# Altium PCB 2PR.PcbDoc
Units mil, origin at the board's own origin, x right, y up, seen from the top; angles counter-clockwise.
Board outline 6000 x 4000 mil, 2 copper layers (Top Layer, Bottom Layer); 40 components, 27 nets, 112 pads, 0 vias.
Unrouted connection lines stored in the file: 60.
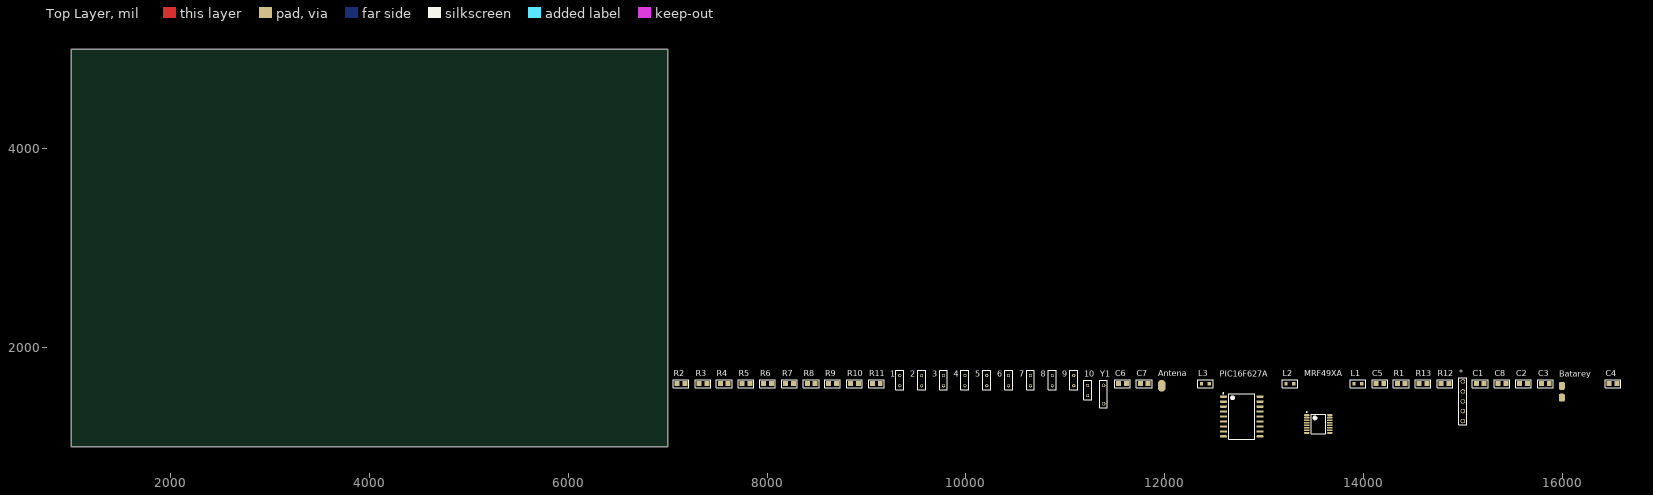
[diagram p0: Top Layer view]
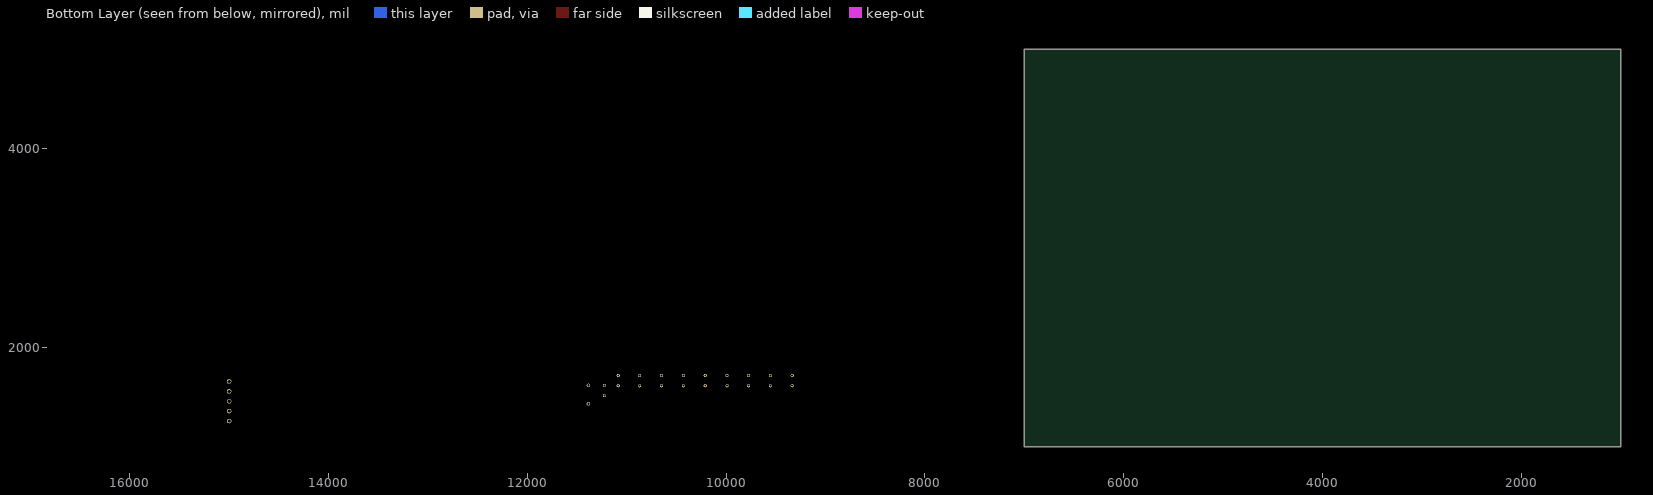
[diagram p1: Bottom Layer view, seen from below]

## Layer stack, top to bottom
Top Solder: solder mask 0.4, Solder Resist, Dk 3.5
Top Layer: signal copper 1.4
Dielectric 1: dielectric 12.6, FR-4, Dk 4.8
Bottom Layer: signal copper 1.4
Bottom Solder: solder mask 0.4, Solder Resist, Dk 3.5

## Board outline
1000,1000 7000,1000 7000,5000 1000,5000

## Design rules (kind name [scope] priority, off if disabled: settings)
Clearance [All] p1: gap=10
PolygonConnect [All] p1: connectstyle=Relief reliefconductorwidth=10 reliefentries=4 polygonreliefangle="90 Angle" airgapwidth=10
RoutingVias [All] p1: holewidth=28 width=50 viastyle="Through Hole" minholewidth=28 minwidth=50 maxholewidth=28 maxwidth=50
SolderMaskExpansion [All] p1: expansion=4
Width [All] p1: maxlimit=10 minlimit=10 preferedwidth=10
30 further rules are at their usual default settings.

## Components (designator, comment, footprint, x,y, rotation, side; value= is the part's Value field where it differs from the comment)
1 "" "Light-emitting diode" 9335,1615 r90 top
2 "" "Light-emitting diode" 9555,1615 r90 top
3 "" "Light-emitting diode" 9775,1615 r90 top
4 "" "Light-emitting diode" 9990,1615 r90 top
5 "" "Light-emitting diode" 10210,1615 r90 top
6 "" "Light-emitting diode" 10430,1615 r90 top
7 "" "Light-emitting diode" 10650,1615 r90 top
8 "" "Light-emitting diode" 10870,1615 r90 top
9 "" "Light-emitting diode" 11085,1615 r90 top
10 "" "Light-emitting diode" 11225,1515 r90 top
* "PLS5" PLS5 15000,1260 r90 top
Antena "Antena" Anteny 11970,1615 r90 top
Batarey "Batarey" Batarey 15995,1495 r90 top
C1 "" Ñ0805 15135,1635 r0 top
C2 "" Ñ0805 15570,1635 r0 top
C3 "" Ñ0805 15790,1635 r0 top
C4 "" Ñ0805 16470,1635 r0 top
C5 "" Ñ0805 14125,1635 r0 top
C6 "" Ñ0805 11535,1635 r0 top
C7 "" Ñ0805 11755,1635 r0 top
C8 "" Ñ0805 15355,1635 r0 top
L1 "" L? 13905,1635 r0 top
L2 "" L? 13220,1635 r0 top
L3 "" L? 12370,1635 r0 top
MRF49XA "MRF49XA" MRF49XA 13545,1230 r0 top
PIC16F627A "PIC16F627A" PIC16F627A 12775,1305 r0 top
R1 "" R0805 14340,1635 r0 top
R2 "" R0805 7095,1635 r0 top
R3 "" R0805 7315,1635 r0 top
R4 "" R0805 7530,1635 r0 top
R5 "" R0805 7750,1635 r0 top
R6 "" R0805 7965,1635 r0 top
R7 "" R0805 8185,1635 r0 top
R8 "" R0805 8405,1635 r0 top
R9 "" R0805 8620,1635 r0 top
R10 "" R0805 8840,1635 r0 top
R11 "" R0805 9060,1635 r0 top
R12 "" R0805 14780,1635 r0 top
R13 "" R0805 14560,1635 r0 top
Y1 "Y1" Quartz 11385,1435 r90 top

## Footprints (in the part's own frame and the unit in brackets; to place one, negate y for a bottom-side part, rotate by r counter-clockwise, add the part's x,y. Pads: shape width x height; smd on the part's side, far side on the other; paste and mask are expansions set on the pad)
Anteny [mm]
  oval 3x2 smd: 1(0,0)
Batarey [mm]
  rrect50% 2x1.524 smd: 1(0,0) 2(3,0)
L? [mm]
  rect 0.85x0.85 smd: 1(0,0) 2(2,0)
  silkscreen extent -1,-1 3,1
"Light-emitting diode" [mm]
  round 0.8 hole 0.5: 1(0,0) 2(2.6,0)
  silkscreen extent -1,-1 4,1
MRF49XA [mm]
  oval 1.4x0.45 smd: 1(-2.95,2.275) 2(-2.95,1.625) 3(-2.95,0.975) 4(-2.95,0.325) 5(-2.95,-0.325) 6(-2.95,-0.975) 7(-2.95,-1.625) 8(-2.95,-2.275) 9(2.95,-2.275) 10(2.95,-1.625) 11(2.95,-0.975) 12(2.95,-0.325) 13(2.95,0.325) 14(2.95,0.975) 15(2.95,1.625) 16(2.95,2.275)
  silkscreen extent -3.07,-2.55 1.85,3.17, body extent -2.25,-2.55 2.25,2.55, height 1.2
PIC16F627A [mm]
  oval 1.85x0.6 smd: 1(-4.675,5.08) 2(-4.675,3.81) 3(-4.675,2.54) 4(-4.675,1.27) 5(-4.675,0) 6(-4.675,-1.27) 7(-4.675,-2.54) 8(-4.675,-3.81) 9(-4.675,-5.08) 10(4.675,-5.08) 11(4.675,-3.81) 12(4.675,-2.54) 13(4.675,-1.27) 14(4.675,0) 15(4.675,1.27) 16(4.675,2.54) 17(4.675,3.81) 18(4.675,5.08)
  silkscreen extent -4.8,-5.8 3.35,6.05, body extent -3.75,-5.8 3.75,5.8, height 2.05
PLS5 [mm]
  round 1.15 hole 0.85: 1(0,0) 2(2.55,0) 3(5.01,0) 4(7.56,0) 5(10.11,0)
  silkscreen extent -1,-1 11,1
Quartz [mm]
  round 0.9 hole 0.6: 1(0,0) 2(4.65,0)
  silkscreen extent -1,-1 6,1
R0805 [mm]
  rect 1.27x1.27 smd: 1(0,0) 2(2,0)
  silkscreen extent -1,-1 3,1
Ñ0805 [mm]
  rect 1.27x1.27 smd: 1(0,0) 2(2,0)
  silkscreen extent -1,-1 3,1

## Part data
1 2 3 4 5 6 7 8 9 10: library part "Light-emitting diode"
C1 C2 C3 C4 C5 C6 C7 C8: library part Capacity
L1 L2 L3: library part Inductance
R1 R2 R3 R4 R5 R6 R7 R8 R9 R10 R11 R12 R13: library part Rezistor
Y1: library part Quartz

## Nets (pads, with @x,y where several pads share a name; then routed paths per layer and width w, separated by ;. In a path a pad name is that pad's centre, name@x,y a point inside that pad or via, vN(x,y) a via of type N, cw(c..) or ccw(c..) an arc to the next point about the centre after c; other vN are vias at no path point)
CS: MRF49XA.3 PIC16F627A.17
FSK: MRF49XA.6 PIC16F627A.18
"MCLR VPP": C8.1 PIC16F627A.4 R1.1 R12.1
Net1_1: 1.1 R2.2
Net2_1: 2.1 R3.2
Net3_1: 3.1 R4.2
Net4_1: 4.1 R5.2
Net5_1: 5.1 R6.2
Net6_1: 6.1 R7.2
Net7_1: 7.1 R8.2
Net8_1: 8.1 R9.2
Net9_1: 9.1 R10.2
Net10_1: 10.1 R11.2
Net10_2: 10.2 PIC16F627A.16
Net*_1: *.1 R12.2
Net*_2: *.2 R13.2
NetAntena_1: Antena.1 C7.2
NetC5_1: C5.1 L1.2 L2.1 L3.1 MRF49XA.13
NetC6_1: C6.1 L2.2 MRF49XA.12
NetC6_2: C6.2 C7.1 L3.2
NetMRF49XA_9: MRF49XA.9 Y1.2
RB6: *.5 PIC16F627A.12
RB7: *.4 PIC16F627A.13
SCK: MRF49XA.2 PIC16F627A.2
SDI: MRF49XA.1 PIC16F627A.1
VDD: Batarey.2 C1.2 C2.2 C3.2 C4.2 C5.2 L1.1 MRF49XA.14 PIC16F627A.14 R1.2 R13.1
VSS: *.3 C1.1 C2.1 C3.1 C4.1 C8.2 MRF49XA.11 PIC16F627A.5 R2.1 R3.1 R4.1 R5.1 R6.1 R7.1 R8.1 R9.1 R10.1 R11.1 Y1.1
pads on no net: 1.2 2.2 3.2 4.2 5.2 6.2 7.2 8.2 9.2 Batarey.1 MRF49XA.4 MRF49XA.5 MRF49XA.7 MRF49XA.8 MRF49XA.10 MRF49XA.15 MRF49XA.16 PIC16F627A.3 PIC16F627A.6 PIC16F627A.7 PIC16F627A.8 PIC16F627A.9 PIC16F627A.10 PIC16F627A.11 PIC16F627A.15